# Altium PCB HMC472_SPF5189.PcbDoc
Units mil, origin at the board's own origin, x right, y up, seen from the top; angles counter-clockwise.
Board outline 908 x 984 mil, 2 copper layers (Top Layer, Bottom Layer); 28 components, 22 nets, 102 pads, 88 vias.
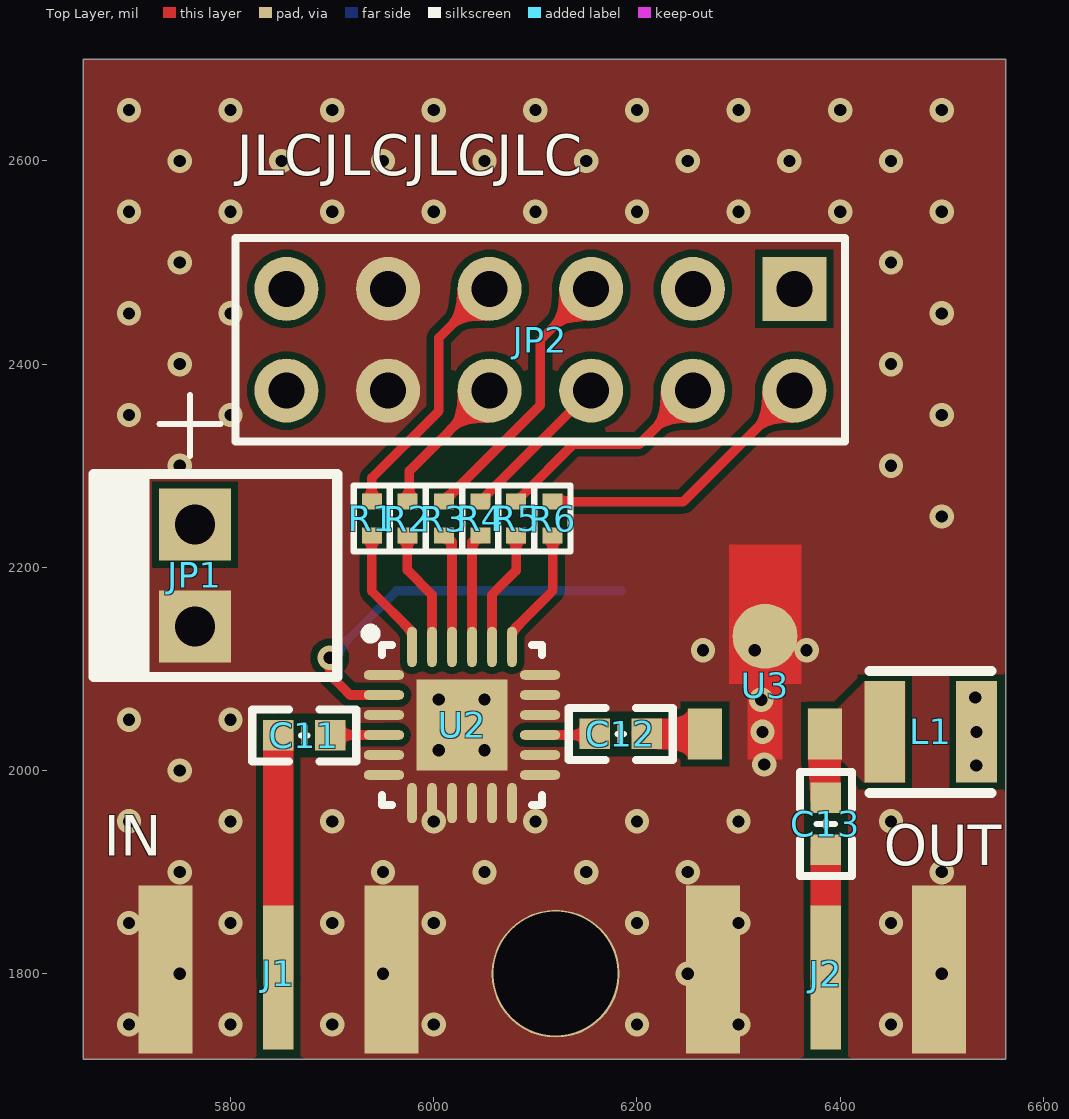
[diagram p0: Top Layer view]
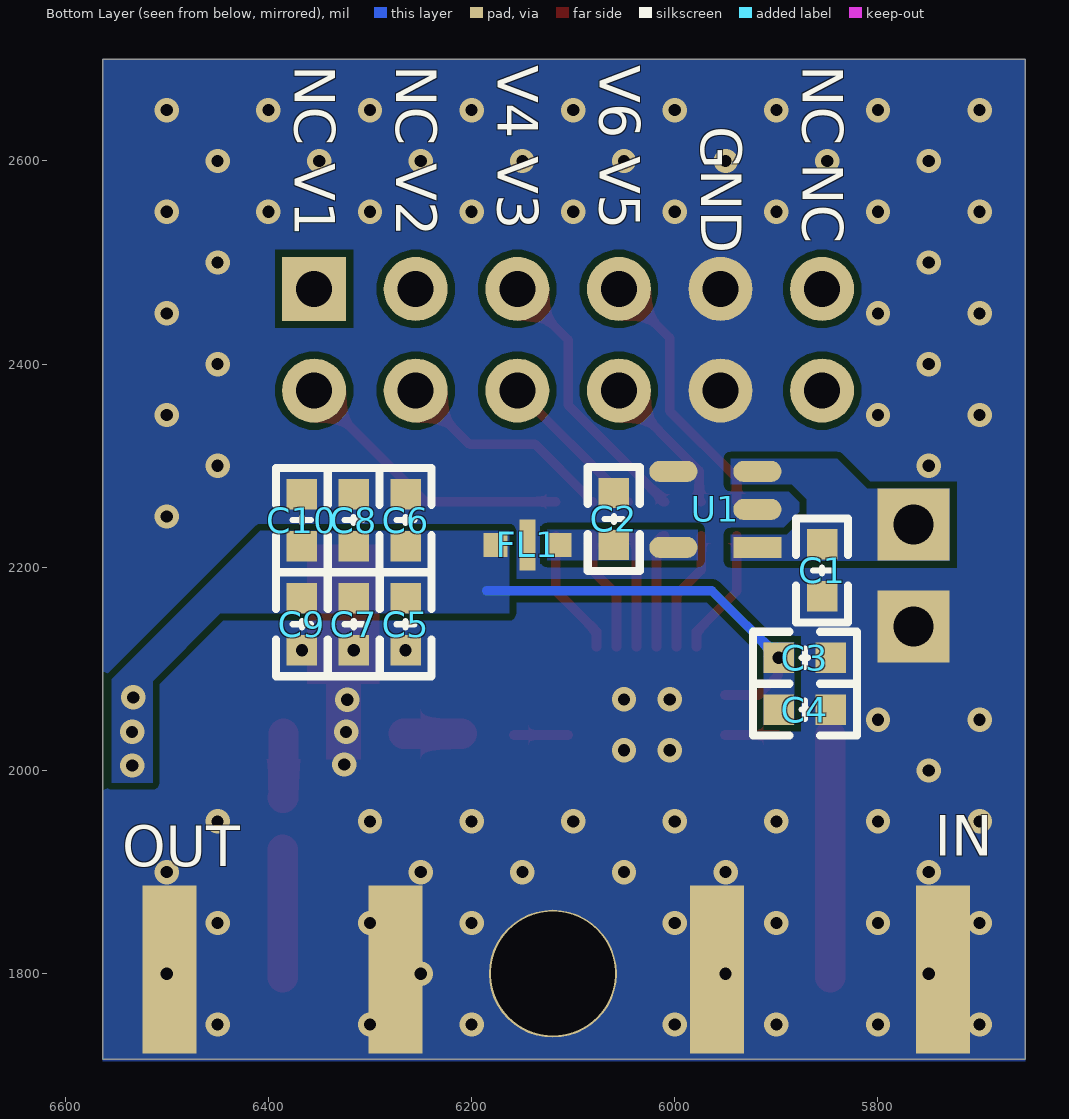
[diagram p1: Bottom Layer view, seen from below]

## Layer stack, top to bottom
Top Solder: solder mask 0.4, Solder Resist, Dk 3.5
Top Layer: signal copper 1.4
Dielectric 1: dielectric 12.6, FR-4, Dk 4.8
Bottom Layer: signal copper 1.4
Bottom Solder: solder mask 0.4, Solder Resist, Dk 3.5

## Board outline
5655,1716 6563,1716 6563,2700 5655,2700

## Design rules (kind name [scope] priority, off if disabled: settings)
Clearance [All] p1: gap=6.87 ignorepadtopadclearanceinfootprint=TRUE
PlaneConnect [All] p1: planeconnectstyle=Direct reliefexpansion=20 reliefentries=4 reliefconductorwidth=10 reliefairgap=10
PolygonConnect [All] p1: connectstyle=Direct reliefconductorwidth=10 reliefentries=4 polygonreliefangle="90 Angle" airgapwidth=10
RoutingVias [All] p1: holewidth=28 width=50 viastyle="Through Hole" minholewidth=28 minwidth=50 maxholewidth=28 maxwidth=50
SolderMaskExpansion [All] p1: expansion=4 istentingtop=FALSE
Width [All] p1: maxlimit=50 minlimit=9.42 preferedwidth=44.08
29 further rules are at their usual default settings.

## Components (designator, comment, footprint, x,y, rotation, side; value= is the part's Value field where it differs from the comment)
C1 "1uF" "C 0603_L" 5855,2197 r90 bottom
C2 "1uF" "C 0603_L" 6060,2247.59 r270 bottom
C3 "100nF" "C 0603_L" 5872.01,2111 r0 bottom
C4 "100pF" "C 0603_L" 5872.01,2060 r0 bottom
C5 "1uF" "C 0603_L" 6265.01,2144 r90 bottom
C6 "100nF" "C 0603_L" 6265,2246.59 r270 bottom
C7 "10nF" "C 0603_L" 6316.01,2144 r90 bottom
C8 "1nF" "C 0603_L" 6316.19,2246.56 r270 bottom
C9 "100pF" "C 0603_L" 6367.01,2144 r90 bottom
C10 "10pF" "C 0603_L" 6367,2246.59 r270 bottom
C11 "100nF" "C 0603_L" 5872.59,2034.65 r0 top
C12 "100nF" "C 0603_L" 6184,2036 r0 top
C13 "100nF" "C 0603_L" 6386,1947.41 r270 top
FL1 "NFM18PC104R1C3D" FIL_NFM18PC104R1C3D 6145,2222 r0 bottom
J1 "SMA-J-P-H-ST-EM1" FP-SMA-J-P-H-ST-EM1-MFG 5847.04,1534.09 r0 top
J2 "SMA-J-P-H-ST-EM1" FP-SMA-J-P-H-ST-EM1-MFG 6386.02,1534.09 r0 top
JP1 "HDR-1X2" KF2510-LI-2P 5765,2192 r90 top
JP2 "Header 6X2" HDR2.54-LI-2x6P 6105,2424 r180 top
L1 "1.2uH" IND-SMD_L2.9-W2.8 6489,2038 r0 top
R1 "30" "R 0402_L" 5939,2249 r270 top
R2 "30" "R 0402_L" 5974,2249 r270 top
R3 "30" "R 0402_L" 6010,2249 r270 top
R4 "30" "R 0402_L" 6046,2249 r270 top
R5 "30" "R 0402_L" 6081,2249 r270 top
R6 "30" "R 0402_L" 6117,2249 r270 top
U1 "TPS7A2050PDBVR" FP-DBV0005A-IPC_C 5960,2257 r0 bottom
U2 "HMC472ALP4E" FP-HMC472ALP4E-IPC_A 6027.82,2044.84 r0 top
U3 "SPF5189" FP-RK-3-MFG 6326.06,2125.66 r0 top

## Footprints (in the part's own frame and the unit in brackets; to place one, negate y for a bottom-side part, rotate by r counter-clockwise, add the part's x,y. Pads: shape width x height; smd on the part's side, far side on the other; paste and mask are expansions set on the pad)
"C 0603_L" [mil] "无极性贴片电容"
  rect 30x30 smd: 1(-25.59,0) 2(25.59,0)
  silkscreen extent -51,-26 51,26, body extent -31,-16 31,16, height 32
FIL_NFM18PC104R1C3D [mm]
  rect 0.6x0.6 smd mask+0: 1(-0.8,0) 3(0.8,0)
  rect 0.4x1.27 smd mask+0: 2(0,0)
  rect 0.4x1.27 on Bottom Solder mask+0: ""(0,0)
  body extent -0.8,-0.4 0.8,0.4, height 0.7
FP-DBV0005A-IPC_C [mm]
  rect 1.205x0.532 smd paste+0 mask+0: 1(-1.05,0.95)
  rrect100% 1.205x0.532 smd paste+0 mask+0: 2(-1.05,0) 3(-1.05,-0.95) 4(1.05,-0.95) 5(1.05,0.95)
  body extent -1.4,-1.45 1.4,1.45, height 1.45
FP-HMC472ALP4E-IPC_A [mm]
  oval 1.01x0.239 smd paste+0 mask+0: 1(-1.951,1.25)
  rrect100% 1.01x0.239 smd paste+0 mask+0: 2(-1.951,0.75) 3(-1.951,0.25) 4(-1.951,-0.25) 5(-1.951,-0.75) 6(-1.951,-1.25) 13(1.951,-1.25) 14(1.951,-0.75) 15(1.951,-0.25) 16(1.951,0.25) 17(1.951,0.75) 18(1.951,1.25)
  rrect100% 0.239x1.01 smd paste+0 mask+0: 7(-1.25,-1.951) 8(-0.75,-1.951) 9(-0.25,-1.951) 10(0.25,-1.951) 11(0.75,-1.951) 12(1.25,-1.951) 19(1.25,1.951) 20(0.75,1.951) 21(0.25,1.951) 22(-0.25,1.951) 23(-0.75,1.951) 24(-1.25,1.951)
  rect 2.286x2.286 smd paste-1000 mask+0: 25(0,0)
  silkscreen extent -2.41,-2 2,2.41, body extent -2.96,-2.96 2.96,2.96, height 0.25
FP-RK-3-MFG [mm]
  rect 0.86x1.27 smd paste+0 mask+0: 1(-1.5,-2.278) 3(1.5,-2.278)
  round 1.62 smd paste+0 mask+0: 2(0,0.164)
  Top Layer region: -0.9,2.458 0.9,2.458 0.9,-1.022 0.43,-1.022 0.43,-2.913 -0.43,-2.913 -0.43,-1.022 -0.9,-1.022 -0.9,2.458
  body extent -2.4,-3.01 2.4,2.56, height 0.25
FP-SMA-J-P-H-ST-EM1-MFG [mm]
  rect 0.762x3.6 smd paste+0 mask+0: 1(0,6.66)
  rect 1.35x4.2 smd paste+0 mask+0: 2(-2.825,6.86) 2(2.825,6.86)
  rect 1.35x4.2 smd far side paste+0 mask+0: 2(-2.825,6.86) 2(2.825,6.86)
  body extent -3.6,-4.92 3.6,9.06, height 0.25
HDR2.54-LI-2x6P [mm] "双排排针，6x2脚"
  rect 1.6x1.6 hole 0.9: 1(-6.35,-1.27)
  round 1.6 hole 0.9: 2(-6.35,1.27) 3(-3.81,-1.27) 4(-3.81,1.27) 5(-1.27,-1.27) 6(-1.27,1.27) 7(1.27,-1.27) 8(1.27,1.27) 9(3.81,-1.27) 10(3.81,1.27) 11(6.35,-1.27) 12(6.35,1.27)
  silkscreen extent -7.62,-2.54 7.62,2.54, body extent -7.62,-2.54 7.62,2.54, height 8.5
IND-SMD_L2.9-W2.8 [mm]
  rect 1.02x2.54 smd paste+0 mask+0.051: 1(-1.145,0) 2(1.145,0)
  silkscreen extent -1.52,-1.52 1.52,1.52, body extent -1.46,-1.4 1.46,1.4, height 2.28
KF2510-LI-2P [mm] "接插件/2A"
  rect 1.8x1.8 hole 1: 1(-1.27,0) 2(1.27,0)
  silkscreen extent -2.59,-3.56 2.54,2.54, body extent -2.54,-3.5 2.54,2.4, height 11.05
"R 0402_L" [mm] "1/16W贴片电阻 https://item.taobao.com/item.htm?ft=t&id=613637044352"
  rect 0.4x0.5 smd: 1(-0.4,0) 2(0.45,0)
  silkscreen extent -0.8,-0.45 0.85,0.45, body extent -0.5,-0.25 0.5,0.25, height 0.3

## Part data
C1 C2 C3 C4 C5 C6 C7 C8 C9 C10 C11 C12 C13: library part C, "贴片电容", BOM名称=贴片电容, 下单链接=https://item.taobao.com/item.htm?ft=t&id=613637044352, 淘宝ID=小糖豆的小窝窝
FL1: "SMD Capacitor with Capacitance: 0.10uF Tol. 20%. Rated Voltage: 16Vdc", Package=NONSTANDARD, Digi-Key_Part_Number=490-6969-1-ND, Digi-Key_Purchase_URL=https://www.digikey.com/product-detail/en/murata-electronics/NFM18PC104R1C3D/490-6969-1-ND/3846166?utm_source=snapeda&utm_medium=aggregator&utm_campaign=symbol, MF=Murata, MP=NFM18PC104R1C3D, SnapEDA_Link=https://www.snapeda.com/parts/NFM18PC104R1C3D/Murata/view-part/4375738/?ref=snap
J1 J2: library part CMP-02754-000006-1, "CONN SMA JACK STR 50OHM EDGE MNT", Case/Package=SMA, Dielectric Material=PTFE, Housing Color=Gold, Max Frequency=6GHz, Max Operating Temperature=125°C, Min Operating Temperature=-65°C, Package Quantity=1, Voltage Rating=335V, Body Material=Brass, Body Plating=Gold, Center Contact Plating=Gold, Connector Type=SMA, Contact Material=Copper, Contact Plating=Gold, Depth=13.33mm, Fastening Type=Threaded, Impedance=50R, Insulation Material=Polytetrafluoroethylene, Length=6.35mm, Mount=Edge, Orientation=Straight, Packaging=Tray, Radiation Hardening=No, RoHS Compliant=Yes, Series=SMA, Termination=Solder
JP1: library part "Header 2", "2P接插件", BOM名称=2P接插件, 下单链接=https://item.taobao.com/item.htm?ft=t&id=613637044352, 淘宝ID=小糖豆的小窝窝
JP2: library part "Header  6X2", "6*2P接插件", BOM名称=6*2P接插件, 下单链接=https://item.taobao.com/item.htm?ft=t&id=613637044352, 淘宝ID=小糖豆的小窝窝
L1: library part L, "小功率贴片电感", BOM名称=小功率贴片电感, 下单链接=https://item.taobao.com/item.htm?ft=t&id=613637044352
R1 R2 R3 R4 R5 R6: library part R, "贴片电阻", BOM名称=贴片电阻, 下单链接=https://item.taobao.com/item.htm?ft=t&id=613637044352, 淘宝ID=小糖豆的小窝窝
U1: library part TPS7A2050, "300-mA, ultra-low-noise, low-IQ, low-dropout (LDO) linear regulator with high PSRR 5-SOT-23 -40 to 125", RoHS Compliant=Yes
U2: "RF ATTENUATOR 31.5DB 50OHM 24QFN", Manufacturer="Analog Devices", Max Frequency=3.8GHz, Package=LFCSP_VQ, Temperature="-40°C to +85°C", Temperature Range High=+85°C, Temperature Range Low=-40°C, Automotive=No, Category=IC, ComponentLink2Description=Datasheet, ComponentLink2URL=https://www.analog.com/media/en/technical-documentation/data-sheets/hmc472a.pdf, Device Class L1="Integrated Circuits (ICs)", Device Class L2="RF Semiconductors and Devices", Device Class L3=unset, Digikey Description="RF ATTENUATOR 31.5DB 50OHM 24QFN", Footprint Url=https://www.analog.com/media/en/package-pcb-resources/package/pkg_pdf/hittite-legacy-packages/HCP-24-2.pdf, Height=1mm, Ipc Land Pattern Name=QFN50P400X400X90-24, Lead Free=Yes, Manufacturer Part Number=HMC472ALP4E, Mouser Description="Attenuators 6 Bit 0.5 LSB dig atten", Octopart=https://octopart.com/hmc472alp4e-analog+devices-51966954, RoHS=TRUE, Standoff Height=0mm
U3: library part HMC480, "IC RF AMP GP 0HZ-5GHZ SOT89", Case/Package=TO-243AA, Max Frequency=5GHz, Max Operating Temperature=85°C, Max Power Dissipation=536mW, Max Supply Voltage=8V, Min Operating Temperature=-40°C, Min Supply Voltage=6V, Operating Frequency="DC to 5 GHz", Operating Supply Current=82mA, Package Quantity=50, Contact Plating=Tin, Gain=19dB, Lead Free="Contains Lead", Mount="Surface Mount", Noise Figure=4dB, Number of Channels=1, Number of Pins=3, Operating Supply Voltage=8V, P1dB=20dBm, Packaging=Strip, RoHS Compliant=Yes, Series=-, Weight=0.004603oz

## Free pads (board coordinates)
  round 125.98 hole 122.05: 2(6120,1800)

## Via types
v1: diameter 24, hole 12, Top Layer to Bottom Layer, tented both sides, 88 vias

## Nets (pads, with @x,y where several pads share a name; then routed paths per layer and width w, separated by ;. In a path a pad name is that pad's centre, name@x,y a point inside that pad or via, vN(x,y) a via of type N, cw(c..) or ccw(c..) an arc to the next point about the centre after c; other vN are vias at no path point)
+5: C3.2 C4.2 C5.2 C6.2 C7.2 C8.2 C9.2 C10.2 FL1.3 L1.2 U2.2 | length 393
  Top Layer w9.42: v1(5897.59,2111) 5898.35,2110.24 5898.35,2093.65 5910,2082 5917.63,2074.37 U2.2
  Bottom Layer w9.42: v1(5897.59,2111) 5963.59,2177 6185,2177
  other v1: 6534,2005 6534.08,2038 6533,2072
GND: C1.1 C2.1 C3.1 C4.1 C5.1 C6.1 C7.1 C8.1 C9.1 C10.1 FL1.2 J1.2 J2.2 JP1.1 JP2.9 JP2.10 pad.2 U1.2 U1.4 U2.1 U2.3 U2.5 U2.6 U2.7 U2.8 U2.9 U2.10 U2.11 U2.12 U2.13 U2.14 U2.16 U2.17 U2.18 U2.25 U3.2
  other v1: 5700,1750 5800,1750 5900,1750 6000,1750 6200,1750 6300,1750 6450,1750 5750,1800 5950,1800 6250,1800 6500,1800 5700,1850 5800,1850 5900,1850 6000,1850 6200,1850 6300,1850 6450,1850 5750,1900 5950,1900 6050,1900 6150,1900 6250,1900 6500,1900 5700,1950 5800,1950 5900,1950 6000,1950 6100,1950 6200,1950 6300,1950 6450,1950 5750,2000 6325.38,2005.97 6005,2020 6050,2020 6323.51,2038.05 5700,2050 5800,2050 6005,2070 6050,2070 6322.39,2069.76 6265,2118.41 6316,2118.41 6367,2118.41 6500,2250 5750,2300 6450,2300 5700,2350 5800,2350 6500,2350 5750,2400 6450,2400 5700,2450 5800,2450 6500,2450 5750,2500 6450,2500 5700,2550 5800,2550 5900,2550 6000,2550 6100,2550 6200,2550 6300,2550 6400,2550 6500,2550 5750,2600 5850,2600 5950,2600 6050,2600 6150,2600 6250,2600 6350,2600 6450,2600 5700,2650 5800,2650 5900,2650 6000,2650 6100,2650 6200,2650 6300,2650 6400,2650 6500,2650
NetC2_2: C2.2 FL1.1 U1.5
NetC11_1: C11.1 J1.1 | length 238.4
  Top Layer w30: J1.1 C11.1
NetC11_2: C11.2 U2.4 | length 53
  Top Layer w9.42: C11.2 5898.54,2035 U2.4
NetC12_1: C12.1 U2.15 | length 53.8
  Top Layer w9.42: U2.15 C12.1@6158.41,2035
NetC12_2: C12.2 U3.1 | length 57.4
  Top Layer w30: C12.2 U3.1
NetC13_1: C13.1 L1.1 U3.3 | length 63.5
  Top Layer w30: U3.3 6385.11,1973.89 ccw(c6386,1973.89) C13.1
NetC13_2: C13.2 J2.1 | length 125.5
  Top Layer w30: J2.1 C13.2
NetR1_2: R1.2 U2.24 | length 126
  Top Layer w9.42: R1.2 5939,2176.44 5978.61,2136.83 U2.24
NetR2_2: R2.2 U2.23 | length 119.7
  Top Layer w9.42: R2.2 5974,2197.19 5998.29,2172.89 U2.23
NetR3_2: R3.2 U2.22 | length 114.1
  Top Layer w9.42: R3.2 6011.97,2231.29 6017.98,2225.27 U2.22
NetR4_2: R4.2 U2.21 | length 114.2
  Top Layer w9.42: U2.21 6037.66,2224.92 6044.03,2231.29 R4.2
NetR5_2: R5.2 U2.20 | length 119.4
  Top Layer w9.42: U2.20 6057.35,2173.22 6081,2196.87 R5.2
NetR6_2: R6.2 U2.19 | length 126.2
  Top Layer w9.42: U2.19 6077.03,2136.83 6117,2176.79 R6.2
V1: JP2.2 R6.1 | length 283.3
  Top Layer w9.42: R6.1 6245.75,2264.75 JP2.2
V2: JP2.4 R5.1 | length 220.4
  Top Layer w9.42: R5.1 6082.97,2264.75 6086.13,2267.91 6086.13,2269.88 6137.25,2321 6202,2321 JP2.4
V3: JP2.6 R4.1 | length 155.6
  Top Layer w9.42: R4.1 6047.97,2264.75 6051.13,2267.91 6051.13,2270.13 JP2.6
V4: JP2.5 R3.1 | length 270.5
  Top Layer w9.42: R3.1 6011.97,2264.75 6015.13,2267.91 6015.13,2269.88 6105,2359.75 6105,2424 JP2.5
V5: JP2.8 R2.1 | length 142.8
  Top Layer w9.42: R2.1 5975.97,2266.72 5975.97,2294.97 JP2.8
V6: JP2.7 R1.1 | length 258.5
  Top Layer w9.42: R1.1 5939,2288 6005,2354 6005,2426 6053,2474 JP2.7
VIN: C1.2 JP1.2 U1.1 U1.3
pads on no net: FL1. JP2.1 JP2.3 JP2.11 JP2.12

## Polygon pours and split planes (outlines as drawn)
GND on Bottom Layer "NONET_L-01_P-001" (solid, remove dead copper, pour order 10): 5655,2700 6563,2700 6563,1714 5655,1714
+5 on Bottom Layer "NONET_L-01_P-001" (solid, remove dead copper, pour order 8): 6370,2235.99 6408.01,2235.99 6554.11,2089.89 6554.11,1988 6513.93,1988 6513.93,2088.07 6447.4,2154.6 6370,2154.6
+5 on Bottom Layer "NONET_L-01_P-001" (solid, remove dead copper, pour order 6): 5882.61,2126.05 5882.61,2045 5912.58,2045 5912.58,2126.05
+5 on Bottom Layer "NONET_L-01_P-001" (solid, remove dead copper, pour order 2): 6162.77,2154.6 6384,2154.6 6384,2235.99 6162.77,2235.99
NetC2_2 on Bottom Layer "NONET_L-01_P-001" (solid, remove dead copper, pour order 1): 6125.31,2207 5977.6,2207 5977.6,2237 6125.31,2237
VIN on Bottom Layer "NONET_L-01_P-001" (solid, remove dead copper, pour order 0): 5729.54,2206.54 5945,2206.54 5945,2232 5890,2232 5870,2252 5870,2267 5885,2282 5945,2282 5945,2307 5840,2307 5810.41,2277.41 5729.54,2277.41
GND on Top Layer "NONET_L-01_P-001" (solid, remove dead copper, pour order 9): 5655,2700 6563,2700 6563,1716 5655,1716
NetC13_1 on Top Layer "NONET_L-01_P-001" (solid, remove dead copper, pour order 7): 6368,2061 6397,2061 6424,2088 6464,2088 6464,1988 6423,1988 6400,2011 6368,2011

## Other copper
Top Layer:
  pour cut-out: 6364.14,1943.24 6364.14,1950.68 6407.86,1950.68 6407.86,1943.68
  pour cut-out: 6180.28,2057.84 6187.72,2057.84 6187.72,2014.13 6180.71,2014.13
  pour cut-out: 5868.87,2056.51 5876.31,2056.51 5876.31,2012.8 5869.3,2012.8

## Silkscreen, mask and mechanical layers (free items; w line width, h text height)
Top Overlay:
  lines w6: 5729.92,2341 5789.92,2341 ; 5760,2309.65 5760,2369.65
  text "JLCJLCJLCJLC" at 5806,2586 h40
  text "IN" at 5675,1916 h40
  text "OUT" at 6443,1907 h40
Bottom Overlay:
  text "NC NC" at 5874,2694 h40 r90
  text "V6 V5" at 6074,2694 h40 r90
  text "V4 V3" at 6174,2694 h40 r90
  text "NC V2" at 6274,2694 h40 r90
  text "NC V1" at 6374,2694 h40 r90
  text "GND" at 5974,2634 h40 r90
  text "IN" at 5744,1916 h40
  text "OUT" at 6544,1906 h40
Mechanical 1:
  the board outline again, w6